# Altium PCB ATECC.PcbDoc
Units mm, origin at the board's own origin, x right, y up, seen from the top; angles counter-clockwise.
Board outline 33.15 x 89.79 mm, 2 copper layers (Top Layer, Bottom Layer); 6 components, 4 nets, 74 pads, 5 vias.
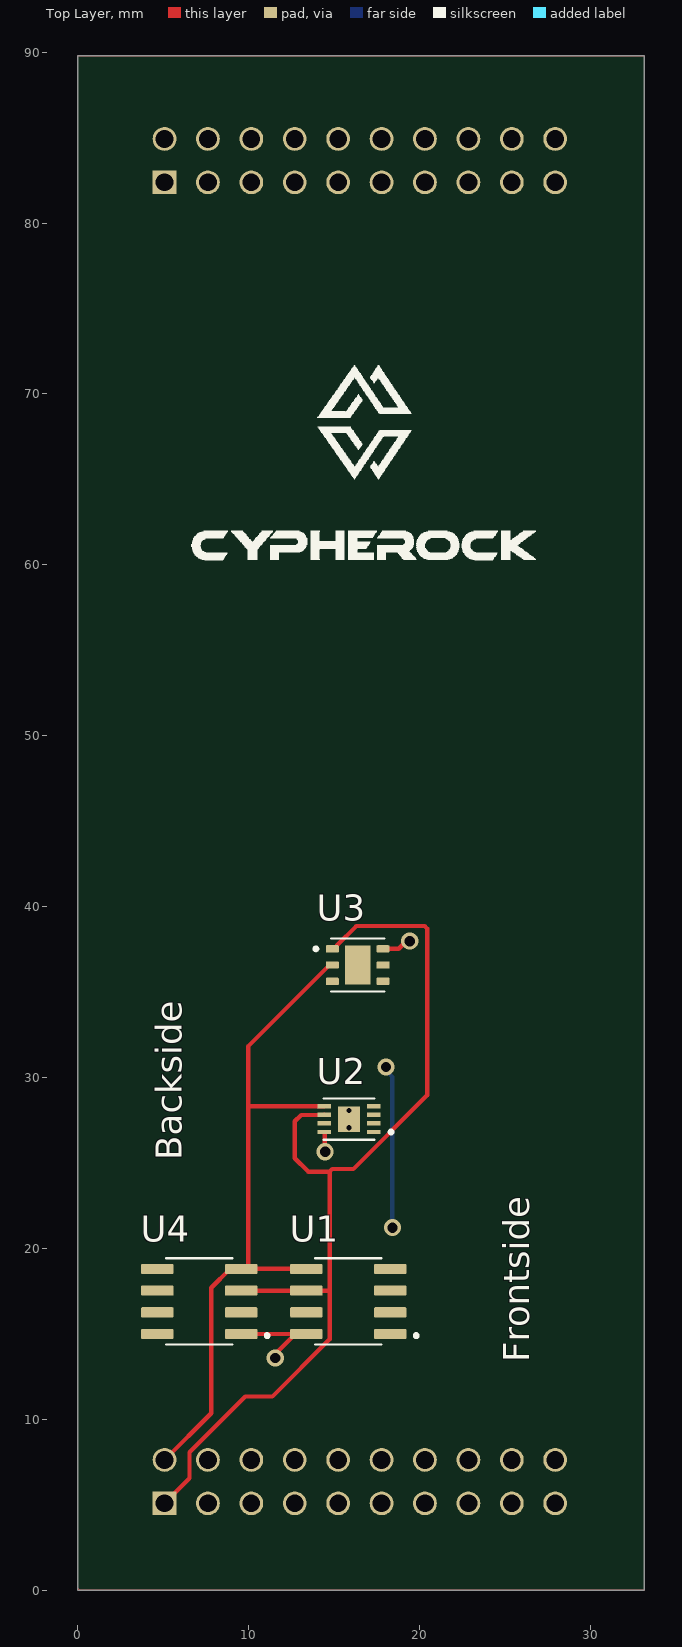
[diagram p0: Top Layer view]
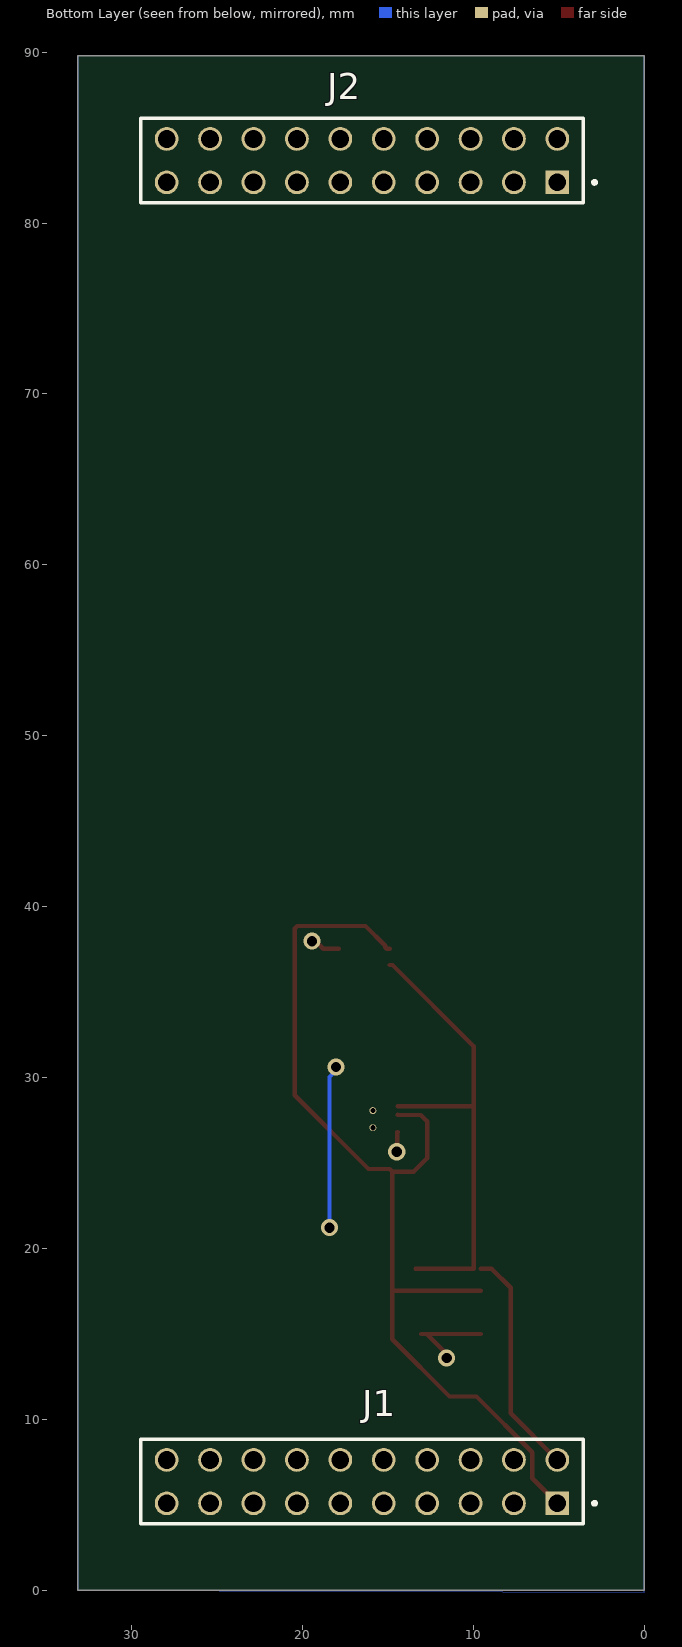
[diagram p1: Bottom Layer view, seen from below]

## Layer stack, top to bottom
Top Solder: solder mask 0.0102, Solder Resist, Dk 3.5
Top Layer: signal copper 0.0356
Dielectric 1: dielectric 0.32, FR-4, Dk 4.8
Bottom Layer: signal copper 0.0356
Bottom Solder: solder mask 0.0102, Solder Resist, Dk 3.5

## Board outline
0,0 33.147,0 33.147,89.789 0,89.789

## Design rules (kind name [scope] priority, off if disabled: settings)
Clearance [All] p1: gap=0.254 ignorepadtopadclearanceinfootprint=FALSE except(0: Arc-Hole Track-Hole SMDPad-Hole THPad-Hole Via-Hole Fill-Hole Poly-Hole Region-Hole Text-Hole; 0.2: Arc-Arc Arc-Track Arc-SMDPad Track-Track Track-SMDPad SMDPad-SMDPad)
PolygonConnect [All] p1: connectstyle=Relief reliefconductorwidth=0.254 reliefentries=4 polygonreliefangle="90 Angle" airgapwidth=0.254
RoutingVias [All] p1: holewidth=0.711 width=1.27 viastyle="Through Hole" minholewidth=0.711 minwidth=1.27 maxholewidth=0.711 maxwidth=1.27
SolderMaskExpansion [All] p1: expansion=0.102 istentingtop=FALSE
Width [All] p1: maxlimit=0.254 minlimit=0.2 preferedwidth=0.254 minimp=50.000000 maximp=50.000000 favimp=50.000000
30 further rules are at their usual default settings.

## Components (designator, comment, footprint, x,y, rotation, side; value= is the part's Value field where it differs from the comment)
J1 "SSW-110-01-G-D-LL" SAMTEC_SSW-110-01-G-D-LL 5.08,5.08 r180 bottom locked
J2 "SSW-110-01-G-D-LL" SAMTEC_SSW-110-01-G-D-LL 5.08,82.38 r180 bottom locked
U1 "ATECC608B-SSHDA-T" SOIC127P600X175-8N 15.833,16.891 r180 top
U2 "ATECC608A-MAHDA-T" SON50P200X300X60-9N 15.875,27.559 r180 top
U3 "DS28C36Q+T" SON95P300X300X80-7N 16.383,36.576 r0 top
U4 "ATECC608B-SSHDA-T" SOIC127P600X175-8N 7.112,16.891 r180 top

## Footprints (in the part's own frame and the unit in brackets; to place one, negate y for a bottom-side part, rotate by r counter-clockwise, add the part's x,y. Pads: shape width x height; smd on the part's side, far side on the other; paste and mask are expansions set on the pad)
SAMTEC_SSW-110-01-G-D-LL [mm]
  rect 1.39x1.39 hole 1.04: 01(0,0)
  round 1.39 hole 1.04: 02(0,2.54) 03(-2.54,0) 04(-2.54,2.54) 05(-5.08,0) 06(-5.08,2.54) 07(-7.62,0) 08(-7.62,2.54) 09(-10.16,0) 10(-10.16,2.54) 11(-12.7,0) 12(-12.7,2.54) 13(-15.24,0) 14(-15.24,2.54) 15(-17.78,0) 16(-17.78,2.54) 17(-20.32,0) 18(-20.32,2.54) 19(-22.86,0) 20(-22.86,2.54)
  silkscreen extent -24.39,-1.21 2.27,3.75
SOIC127P600X175-8N [mm]
  rrect25% 1.9x0.6 smd: 1(-2.455,1.905) 2(-2.455,0.635) 3(-2.455,-0.635) 4(-2.455,-1.905) 5(2.455,-1.905) 6(2.455,-0.635) 7(2.455,0.635) 8(2.455,1.905)
  silkscreen extent -4.07,-2.52 1.95,2.52, body extent -3,-2.45 3,2.45, height 1.75
SON50P200X300X60-9N [mm]
  rrect25% 0.81x0.26 smd: 1(-1.45,0.75) 2(-1.45,0.25) 3(-1.45,-0.25) 4(-1.45,-0.75) 5(1.45,-0.75) 6(1.45,-0.25) 7(1.45,0.25) 8(1.45,0.75)
  rect 1.3x1.5 smd paste-2: 9(0,0)
  round 0.4 hole 0.3: 9_1(0,0.5) 9_2(0,-0.5)
  silkscreen extent -2.56,-1.2 1.5,1.2
SON95P300X300X80-7N [mm]
  rrect25% 0.76x0.42 smd: 1(-1.485,0.95) 2(-1.485,0) 3(-1.485,-0.95) 4(1.485,-0.95) 5(1.485,0) 6(1.485,0.95)
  rect 1.5x2.3 smd paste-2: 7(0,0)
  silkscreen extent -2.54,-1.55 1.55,1.55

## Part data
J1 J2 U3: Package=None, Availability=Unavailable, Price=None
  J1 J2: MF="Samtec Inc.", MP=SSW-110-01-G-D-LL
  U3: MP=DS28C36Q+T
U1 U4: "Security ICs / Authentication ICs ECC/ECDH, I2C, SOIC T/R", Package="SO-8 Microchip", Availability="In Stock", Check_prices=https://www.snapeda.com/parts/ATECC608B-SSHDA-T/Microchip/view-part/?ref=eda, MF="Microchip Technology", MP=ATECC608B-SSHDA-T, Price=None, Purchase-URL=https://pricing.snapeda.com/search/part/ATECC608B-SSHDA-T/?ref=eda, SnapEDA_Link=https://www.snapeda.com/parts/ATECC608B-SSHDA-T/Microchip/view-part/?ref=snap
U2: "Authentication Chip 8-UDFN _2x3_", Package="UDFN-8 Microchip Technology", Digi-Key_Part_Number=ATECC608A-MAHDA-TCT-ND, Digi-Key_Purchase_URL=https://www.digikey.com/product-detail/en/microchip-technology/ATECC608A-MAHDA-T/ATECC608A-MAHDA-TCT-ND/7928236?utm_source=snapeda&utm_medium=aggregator&utm_campaign=symbol, MF="Microchip Technology", MP=ATECC608A-MAHDA-T, SnapEDA_Link=https://www.snapeda.com/parts/ATECC608A-MAHDA-T/Microchip/view-part/3076417/?ref=snap

## Via types
v1: diameter 1, hole 0.6, Top Layer to Bottom Layer, tented top, 5 vias

## Nets (pads, with @x,y where several pads share a name; then routed paths per layer and width w, separated by ;. In a path a pad name is that pad's centre, name@x,y a point inside that pad or via, vN(x,y) a via of type N, cw(c..) or ccw(c..) an arc to the next point about the centre after c; other vN are vias at no path point)
GND: J1.17 J1.19 U1.4 U2.4 U3.3 U4.5 | length 9.6
  Bottom Layer w0.254: v1(18.034,30.607) 18.034,30.405 18.415,30.024 v1(18.415,21.209)
SCL: J1.01 U1.6 U2.6 U3.1 U4.3 | length 59.5
  Top Layer w0.254: J1.01 6.544,6.544 6.544,8.066 9.808,11.33 11.391,11.33 14.739,14.678 14.739,17.526 ; U4.3 U1.6 14.739,17.526 ; U2.6 14.422,27.806 13.074,27.806 12.7,27.432 12.7,25.273 13.484,24.489 14.739,24.489 ; U3.1 15.068,37.526 15.151,37.609 15.151,37.706 16.307,38.862 20.298,38.862 20.447,38.713 20.447,28.953 16.132,24.638 14.888,24.638 14.739,24.489 ; 14.739,17.526 14.739,24.489
SDA: J1.02 U1.5 U2.5 U3.2 U4.4 | length 41.2
  Top Layer w0.254: J1.02 7.81,10.351 7.81,17.69 8.917,18.796 U4.4 ; U1.5 9.971,18.796 9.971,28.321 ; U2.5 9.983,28.309 9.971,28.321 ; U3.2 14.728,36.576 9.971,31.819 9.971,28.321
VCC: J1.20 U1.8 U2.8 U3.6 U4.1 | length 8.3
  Top Layer w0.254: U4.1 U1.8@12.728,14.986 ; v1(11.557,13.589) 11.7,13.732 11.7,13.958 U1.8@12.728,14.986 ; U1.8@13.053,14.986 U1.8@12.728,14.986 ; U2.8 14.449,26.809 14.452,26.806 14.452,25.68 v1(14.478,25.654) ; U3.6 18.782,37.526 19.229,37.973 v1(19.431,37.973)
pads on no net: J1.03 J1.04 J1.05 J1.06 J1.07 J1.08 J1.09 J1.10 J1.11 J1.12 J1.13 J1.14 J1.15 J1.16 J1.18 J2.01 J2.02 J2.03 J2.04 J2.05 J2.06 J2.07 J2.08 J2.09 J2.10 J2.11 J2.12 J2.13 J2.14 J2.15 J2.16 J2.17 J2.18 J2.19 J2.20 U1.1 U1.2 U1.3 U1.7 U2.1 U2.2 U2.3 U2.7 U2.9 U2.9_1 U2.9_2 U3.4 U3.5 U3.7 U4.2 U4.6 U4.7 U4.8

## Polygon pours and split planes (outlines as drawn)
VCC on Bottom Layer "NONET_L02_P001" (solid, shelved, pour order 1): 0,-0.127 0,89.789 33.147,89.789 33.147,0
GND on Top Layer "NONET_L01_P000" (solid, remove dead copper, shelved, pour order 0): 0.127,0 0,0.127 0,89.789 33.147,89.789 33.147,0

## Silkscreen, mask and mechanical layers (free items; w line width, h text height)
Top Overlay:
  drawing of 11 lines, arcs and shapes, not listed
  text "Backside" at 6.096,25.146 h1.52 r90
  text "Frontside" at 26.416,13.335 h1.52 r90